# Altium PCB Via Shielding.PcbDoc
Units mm, origin at the board's own origin, x right, y up, seen from the top; angles counter-clockwise.
Board outline 80.01 x 48.01 mm, 2 copper layers (Top Layer, Bottom Layer); 3 components, 54 nets, 62 pads, 0 vias.
Unrouted connection lines stored in the file: 11.
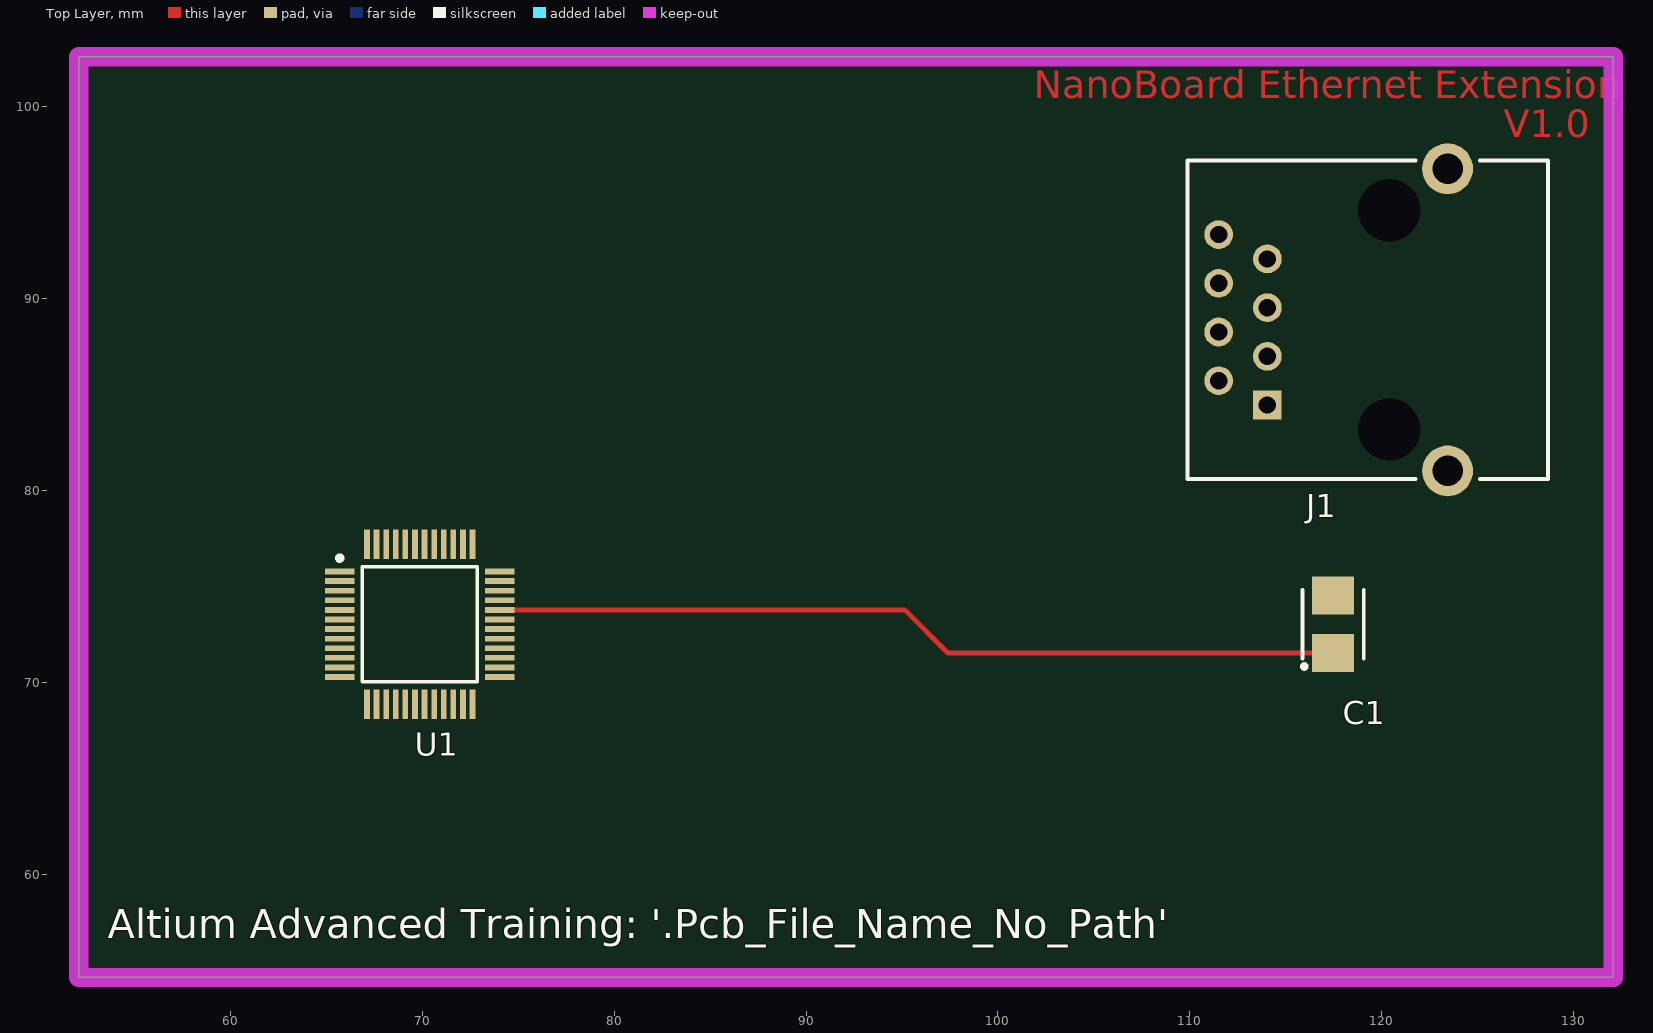
[diagram p0: Top Layer view]
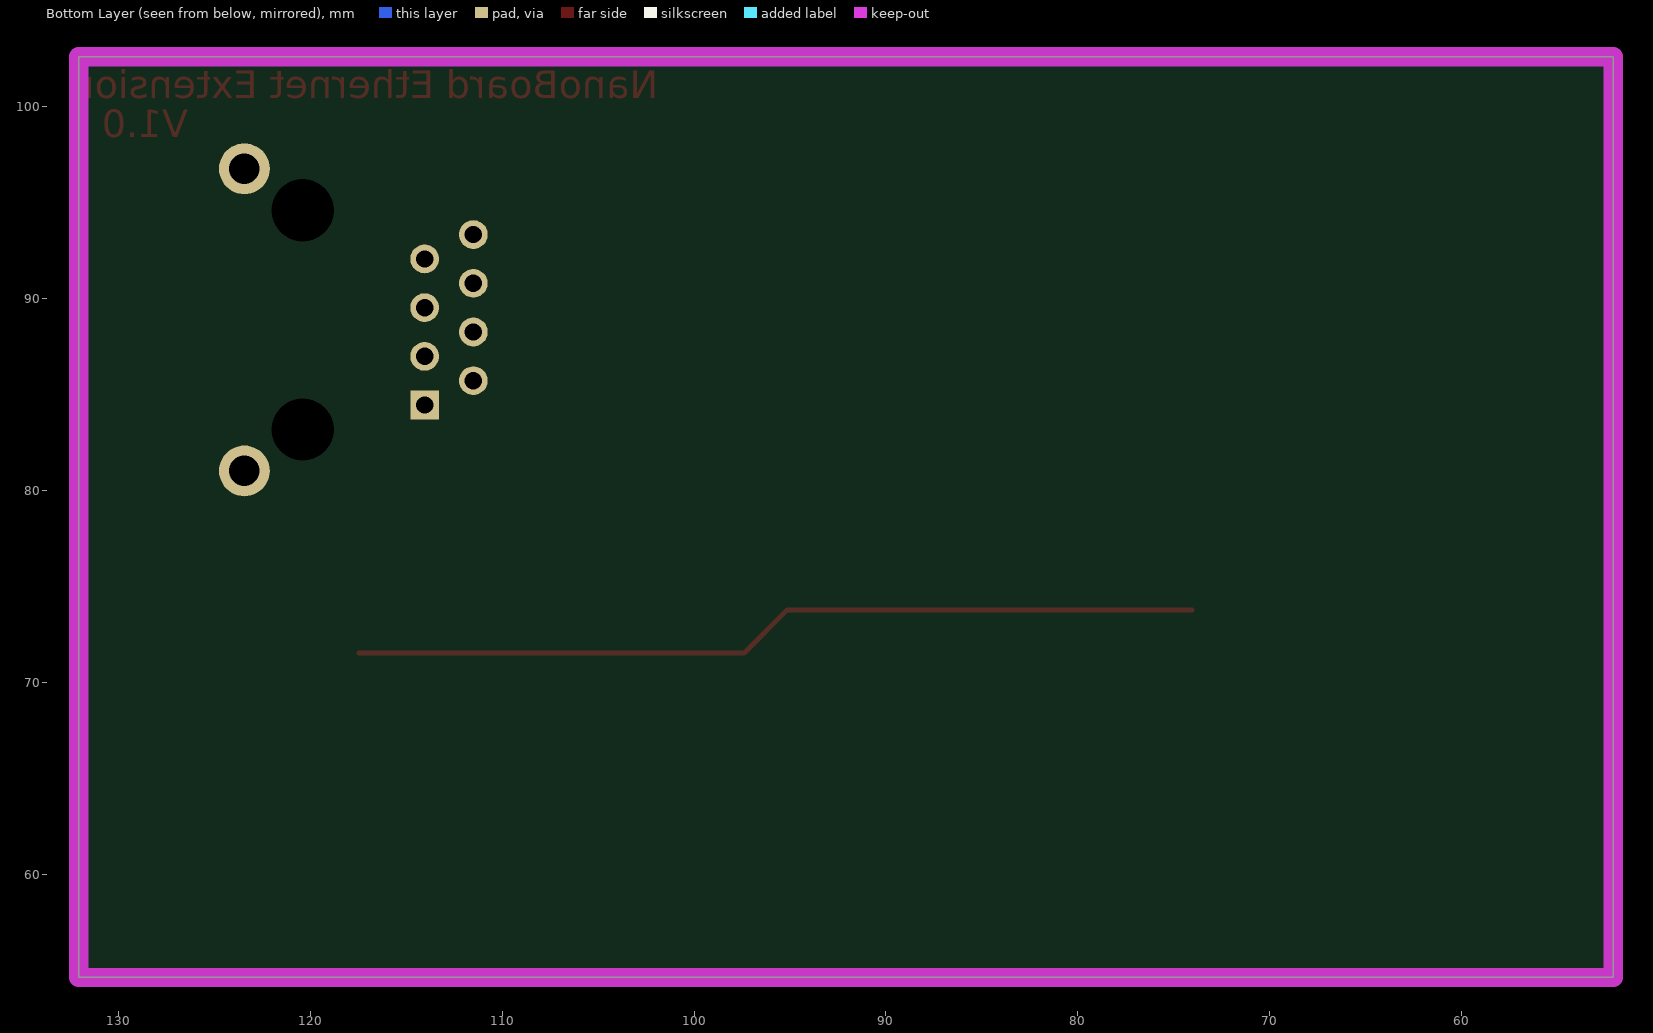
[diagram p1: Bottom Layer view, seen from below]

## Layer stack, top to bottom
Top Solder: solder mask 0.0102, Solder Resist, Dk 3.5
Top Layer: signal copper 0.0356
Dielectric1: dielectric 0.32, FR-4, Dk 4.8
Bottom Layer: signal copper 0.0356
Bottom Solder: solder mask 0.0102, Solder Resist, Dk 3.5

## Board outline
52.07,54.61 52.07,102.616 132.08,102.616 132.08,54.61

## Design rules (kind name [scope] priority, off if disabled: settings)
Clearance Clearance_1 [(HasFootprint('TSQFP50P900X900-48'))] p1: gap=0.2 ignorepadtopadclearanceinfootprint=FALSE except(0: Arc-Hole Track-Hole SMDPad-Hole THPad-Hole Via-Hole Fill-Hole Poly-Hole Region-Hole Text-Hole)
Clearance [All] p2: gap=0.24 ignorepadtopadclearanceinfootprint=FALSE except(0: Arc-Hole Track-Hole SMDPad-Hole THPad-Hole Via-Hole Fill-Hole Poly-Hole Region-Hole Text-Hole)
FabricationTestPointUsage TestPointUsage [All] p1 off: valid=0 allowmultiple=FALSE
FabricationTestpoint Testpoint [All] p1 off: side=3 testpointundercomponent=TRUE minsize=1.016 maxsize=2.54 preferedsize=1.524 minholesize=0 maxholesize=1.016 preferedholesize=0.813 testpointgrid=0.025 allowsidetop=TRUE allowsidebottom=TRUE usegrid=TRUE gridtolerance=0
HoleSize [All] p1: absolutevalues=TRUE maxlimit=3.5 minlimit=0.025 maxpercent=80.000 minpercent=20.000
PolygonConnect [All] p1: connectstyle=Direct reliefconductorwidth=0.254 reliefentries=4 polygonreliefangle="90 Angle" airgapwidth=0.254
RoutingVias [All] p1: holewidth=0.7 width=1.27 viastyle="Through Hole" minholewidth=0.7 minwidth=1.27 maxholewidth=0.7 maxwidth=1.27
SilkToSolderMaskClearance SilkscreenOverComponentPads [IsPad] p1: minsilkscreentomaskgap=0.254 clearancetoexposedcopper=TRUE
SolderMaskExpansion [All] p1: expansion=0.102 istentingtop=FALSE
Width Width_1 [(InNet('3V3') OR InNet('GND') OR InNet('PWFBIN') OR InNet('PWFBOUT'))] p1: maxlimit=0.508 minlimit=0.127 preferedwidth=0.254
Width [All] p2: maxlimit=0.254 minlimit=0.254 preferedwidth=0.254
26 further rules are at their usual default settings.

## Classes and differential pairs
component class PHY: R7

## Components (designator, comment, footprint, x,y, rotation, side; value= is the part's Value field where it differs from the comment)
C1 "22uF 10V" CAPC3528 117.475,73.025 r90 top
J1 "RJ45 HEADER" 95122-2881 117.475,88.9 r90 top
U1 "RTL8201CL" TSQFP50P900X900-48 69.85,73.025 r0 top

## Footprints (in the part's own frame and the unit in brackets; to place one, negate y for a bottom-side part, rotate by r counter-clockwise, add the part's x,y. Pads: shape width x height; smd on the part's side, far side on the other; paste and mask are expansions set on the pad)
95122-2881 [mm]
  rect 1.5x1.5 hole 0.9: 1(-4.445,3.43)
  round 1.5 hole 0.9: 2(-3.175,5.97) 3(-1.905,3.43) 4(-0.635,5.97) 5(0.635,3.43) 6(1.905,5.97) 7(3.175,3.43) 8(4.445,5.97)
  round 2.65 hole 1.6: MH1(-7.875,-5.97) MH2(7.875,-5.97)
  round 2.95 hole 3.25 unplated: MH3(-5.715,-2.92) MH4(5.715,-2.92)
  silkscreen extent -8.3,-11.2 8.3,7.6
CAPC3528 [mm]
  rect 2x2.2 smd: 1(-1.5,0) 2(1.5,0)
  silkscreen extent -2.3,-1.6 1.8,1.6
TSQFP50P900X900-48 [mm]
  rect 1.55x0.3 smd: 1(-4.175,2.75) 2(-4.175,2.25) 3(-4.175,1.75) 4(-4.175,1.25) 5(-4.175,0.75) 6(-4.175,0.25) 7(-4.175,-0.25) 8(-4.175,-0.75) 9(-4.175,-1.25) 10(-4.175,-1.75) 11(-4.175,-2.25) 12(-4.175,-2.75) 25(4.175,-2.75) 26(4.175,-2.25) 27(4.175,-1.75) 28(4.175,-1.25) 29(4.175,-0.75) 30(4.175,-0.25) 31(4.175,0.25) 32(4.175,0.75) 33(4.175,1.25) 34(4.175,1.75) 35(4.175,2.25) 36(4.175,2.75)
  rect 0.3x1.55 smd: 13(-2.75,-4.175) 14(-2.25,-4.175) 15(-1.75,-4.175) 16(-1.25,-4.175) 17(-0.75,-4.175) 18(-0.25,-4.175) 19(0.25,-4.175) 20(0.75,-4.175) 21(1.25,-4.175) 22(1.75,-4.175) 23(2.25,-4.175) 24(2.75,-4.175) 37(2.75,4.175) 38(2.25,4.175) 39(1.75,4.175) 40(1.25,4.175) 41(0.75,4.175) 42(0.25,4.175) 43(-0.25,4.175) 44(-0.75,4.175) 45(-1.25,4.175) 46(-1.75,4.175) 47(-2.25,4.175) 48(-2.75,4.175)
  silkscreen extent -4.3,-3 3,3.57

## Part data
C1: library part "Cap Pol1", "Polarized Capacitor (Radial)"
J1: library part 95122-2881, "Right Angle, Standard Profile, External Shield PCB Jack"
U1: "Realtek Ethernet PHY tranceiver"

## Nets (pads, with @x,y where several pads share a name; then routed paths per layer and width w, separated by ;. In a path a pad name is that pad's centre, name@x,y a point inside that pad or via, vN(x,y) a via of type N, cw(c..) or ccw(c..) an arc to the next point about the centre after c; other vN are vias at no path point)
3V3: U1.14 U1.37 U1.38 U1.39 U1.41 U1.44 U1.48
3V3A: U1.36
COL: U1.1
CRS: U1.23
GND: C1.2 U1.11 U1.17 U1.29 U1.35 U1.40 U1.43 U1.45
LED0: U1.9
LED1: U1.10
LED2: U1.12
LED3: U1.13
LED4: U1.15
MDC: U1.25
MDIO: U1.26
NetC5_1: 
NetC6_2: 
NetC7_2: U1.46
NetC8_2: U1.47
NetC9_1: 
NetC9_2: 
NetC10_2: 
NetC11_2: 
NetDS1_2: 
NetDS2_1: 
NetDS3_1: 
NetDS4_1: 
NetDS5_1: 
NetJ1_1: 
NetJ1_2: 
NetJ1_3: 
NetJ1_4: 
NetJ1_6: 
NetJ1_7: 
NetR2_1: U1.31
NetR3_1: U1.30
NetR5_2: U1.33
NetR6_2: U1.34
NetR10_2: 
NetR11_2: 
NetR14_2: U1.28
PWFBIN: U1.8
PWFBOUT: C1.1 U1.32 | length 44.4
  Top Layer w0.254: U1.32 95.135,73.775 97.385,71.525 C1.1
RESETB: U1.42
RXC: U1.16
RXD0: U1.21
RXD1: U1.20
RXD2: U1.19
RXD3: U1.18
RXDV: U1.22
RXER: U1.24
TXC: U1.7
TXD0: U1.6
TXD1: U1.5
TXD2: U1.4
TXD3: U1.3
TXEN: U1.2
pads on no net: J1.1 J1.2 J1.3 J1.4 J1.5 J1.6 J1.7 J1.8 J1.MH1 J1.MH2 J1.MH3 J1.MH4 U1.27

## Keep-outs
Keep-Out Layer:
  the board outline again, w1

## Other copper
Top Layer:
  text "NanoBoard Ethernet Extension" at 101.854,100.457 h1.45
  text "V1.0" at 126.365,98.425 h1.45

## Silkscreen, mask and mechanical layers (free items; w line width, h text height)
Top Overlay:
  text "Altium Advanced Training: '.Pcb_File_Name_No_Path'" at 53.594,56.642 h1.52